# Altium PCB ACH512识别升级仪V1.2_20260608.PcbDoc (part 2 of 6)
Units mil, origin at the board's own origin, x right, y up, seen from the top; angles counter-clockwise.
Board outline 6141.73 x 5401.57 mil, 2 copper layers (Top Layer, Bottom Layer); 157 components, 111 nets, 548 pads, 222 vias.
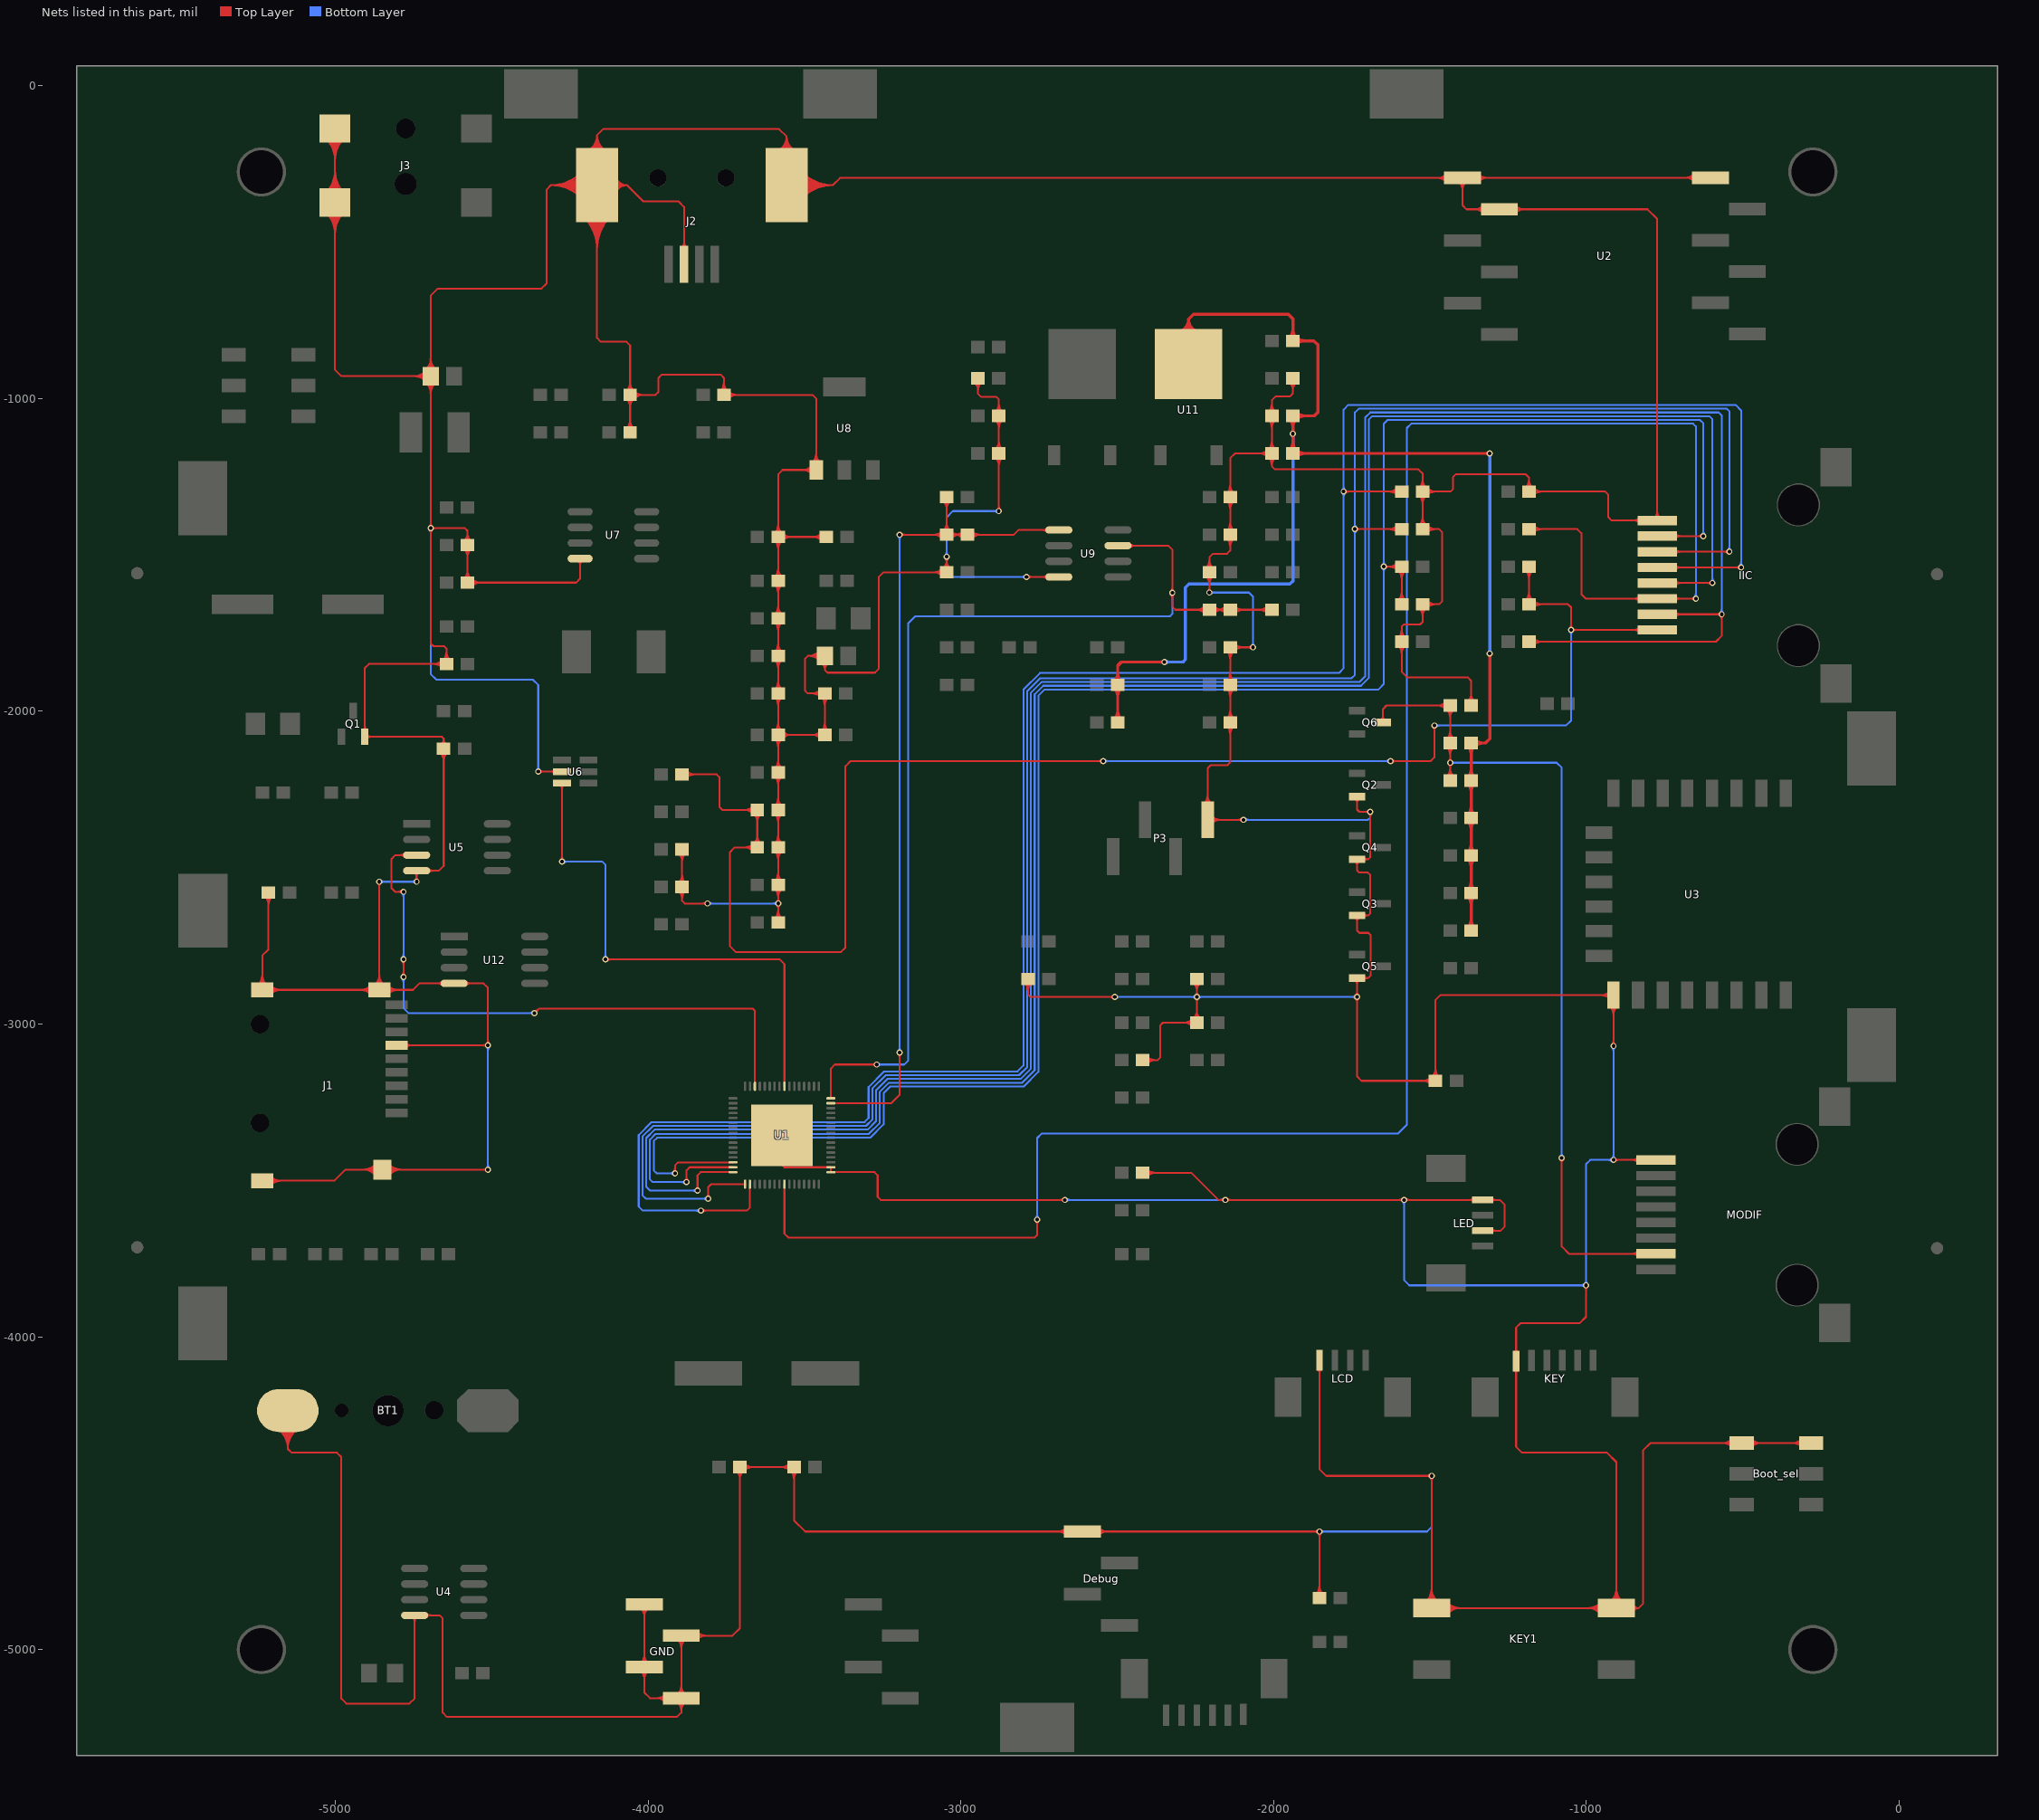
[diagram p2: the nets of this part, all layers, seen from the top]

## Via types
v1: diameter 19.68, hole 11.81, Top Layer to Bottom Layer, 222 vias

## Nets (pads, with @x,y where several pads share a name; then routed paths per layer and width w, separated by ;. In a path a pad name is that pad's centre, name@x,y a point inside that pad or via, vN(x,y) a via of type N, cw(c..) or ccw(c..) an arc to the next point about the centre after c; other vN are vias at no path point) (continued)
CHIP1_5.3V: C32.2 C35.2 C39.2 C45.1 C46.1 R29.2 R30.2 R36.1 R38.2 R45.2 R57.2 U11.4 | length 6304.3
  Top Layer w10: C39.2@-2508.73,-2025.21 ccw(c-2533.8,-2000.14) -2498.35,-2000.14 ccw(c-2462.89,-2000.14) C39.2@-2487.96,-2025.21 ; R45.2@-2508.73,-1925.97 cw(c-2533.8,-1951.04) -2498.35,-1951.04 cw(c-2462.89,-1951.04) R45.2@-2487.96,-1925.97 ; R45.2@-2508.73,-1905.21 ccw(c-2533.8,-1880.14) -2498.35,-1880.14 ccw(c-2462.89,-1880.14) R45.2@-2487.96,-1905.21 ; C39.2@-2498.35,-2035.59 R45.2@-2498.35,-1915.59 -2498.35,-1854.13 -2486.81,-1842.59 v1(-2348.81,-1842.59) ; v1@-2352.23,-1846.01 ccw(c-2360.5,-1854.28) -2360.5,-1842.59 ccw(c-2360.5,-1830.9) v1@-2352.23,-1839.17 ; U11.4@-2301.89,-787.19 ccw(c-2314.25,-746.59) -2271.81,-746.59 ; U11.4@-2298.98,-796.76 ccw(c-2310.14,-760.09) -2271.81,-760.09 ccw(c-2233.48,-760.09) U11.4@-2244.64,-796.76 ; U11.4@-2296.06,-806.33 ccw(c-2306.03,-773.59) -2271.81,-773.59 ccw(c-2237.59,-773.59) U11.4@-2247.56,-806.33 ; U11.4@-2271.81,-889.92 -2271.81,-746.59 ; U11.4@-2241.73,-787.19 cw(c-2229.37,-746.59) -2271.81,-746.59 ; C46.1@-1948.73,-1165.21 ccw(c-1973.8,-1140.14) -1938.35,-1140.14 ccw(c-1902.89,-1140.14) C46.1@-1927.96,-1165.21 ; C45.1@-1948.73,-1065.97 cw(c-1973.8,-1091.04) -1938.35,-1091.04 cw(c-1902.89,-1091.04) C45.1@-1927.96,-1065.97 ; R57.2@-1948.73,-805.21 ccw(c-1973.8,-780.14) -1938.35,-780.14 ccw(c-1902.89,-780.14) R57.2@-1927.96,-805.21 ; v1@-1941.77,-1116.01 cw(c-1950.04,-1124.28) -1938.35,-1124.28 cw(c-1926.65,-1124.28) v1@-1934.92,-1116.01 ; v1@-1941.77,-1109.17 ccw(c-1950.04,-1100.9) -1938.35,-1100.9 ccw(c-1926.65,-1100.9) v1@-1934.92,-1109.17 ; C46.1@-1925.99,-1185.97 cw(c-1900.92,-1211.04) -1900.92,-1175.59 cw(c-1900.92,-1140.14) C46.1@-1925.99,-1165.21 ; C45.1@-1925.99,-1065.97 cw(c-1900.92,-1091.04) -1900.92,-1055.59 cw(c-1900.92,-1020.14) C45.1@-1925.99,-1045.21 ; R57.2@-1925.99,-825.97 cw(c-1900.92,-851.04) -1900.92,-815.59 cw(c-1900.92,-780.14) R57.2@-1925.99,-805.21 ; R36.1@-1378.73,-2691.21 ccw(c-1403.8,-2666.14) -1368.35,-2666.14 ccw(c-1332.89,-2666.14) R36.1@-1357.96,-2691.21 ; R30.2@-1378.73,-2591.97 cw(c-1403.8,-2617.04) -1368.35,-2617.04 cw(c-1332.89,-2617.04) R30.2@-1357.96,-2591.97 ; R30.2@-1378.73,-2571.21 ccw(c-1403.8,-2546.14) -1368.35,-2546.14 ccw(c-1332.89,-2546.14) R30.2@-1357.96,-2571.21 ; C32.2@-1378.73,-2471.97 cw(c-1403.8,-2497.04) -1368.35,-2497.04 cw(c-1332.89,-2497.04) C32.2@-1357.96,-2471.97 ; C32.2@-1378.73,-2451.21 ccw(c-1403.8,-2426.14) -1368.35,-2426.14 ccw(c-1332.89,-2426.14) C32.2@-1357.96,-2451.21 ; R29.2@-1378.73,-2351.97 cw(c-1403.8,-2377.04) -1368.35,-2377.04 cw(c-1332.89,-2377.04) R29.2@-1357.96,-2351.97 ; R29.2@-1378.73,-2331.21 ccw(c-1403.8,-2306.14) -1368.35,-2306.14 ccw(c-1332.89,-2306.14) R29.2@-1357.96,-2331.21 ; R38.2@-1378.73,-2231.97 cw(c-1403.8,-2257.04) -1368.35,-2257.04 cw(c-1332.89,-2257.04) R38.2@-1357.96,-2231.97 ; R38.2@-1378.73,-2211.21 ccw(c-1403.8,-2186.14) -1368.35,-2186.14 ccw(c-1332.89,-2186.14) R38.2@-1357.96,-2211.21 ; C35.2@-1378.73,-2111.97 cw(c-1403.8,-2137.04) -1368.35,-2137.04 cw(c-1332.89,-2137.04) C35.2@-1357.96,-2111.97 ; R36.1@-1368.35,-2701.59 R30.2@-1368.35,-2581.59 C32.2@-1368.35,-2461.59 R29.2@-1368.35,-2341.59 R38.2@-1368.35,-2221.59 C35.2@-1368.35,-2101.59 -1322.81,-2101.59 -1308.81,-2087.59 v1(-1308.81,-1815.59) ; C35.2@-1355.99,-2111.97 cw(c-1330.92,-2137.04) -1330.92,-2101.59 cw(c-1330.92,-2066.14) C35.2@-1355.99,-2091.21 ; v1@-1312.23,-1819.01 cw(c-1320.5,-1827.28) -1308.81,-1827.28 cw(c-1297.12,-1827.28) v1@-1305.39,-1819.01 ; v1@-1312.23,-1179.01 ccw(c-1320.5,-1187.28) -1320.5,-1175.59 ccw(c-1320.5,-1163.9) v1@-1312.23,-1172.17 ; v1(-1308.81,-1175.59) C46.1@-1938.35,-1175.59 v1(-1938.35,-1112.59) C45.1@-1938.35,-1055.59 -1869.81,-1055.59 -1858.81,-1044.59 -1858.81,-827.59 -1870.81,-815.59 R57.2@-1938.35,-815.59 -1938.35,-745.05 -1952.81,-730.59 -2255.81,-730.59 -2271.81,-746.59
  Bottom Layer w10: v1(-2348.81,-1842.59) -2289.81,-1842.59 -2281.81,-1834.59 -2281.81,-1604.59 -2270.81,-1593.59 -1947.81,-1593.59 -1938.35,-1584.13 v1(-1938.35,-1112.59) ; v1@-2345.39,-1846.01 cw(c-2337.12,-1854.28) -2337.12,-1842.59 cw(c-2337.12,-1830.9) v1@-2345.39,-1839.17 ; v1@-1941.77,-1116.01 cw(c-1950.04,-1124.28) -1938.35,-1124.28 cw(c-1926.65,-1124.28) v1@-1934.92,-1116.01 ; v1@-1312.23,-1812.17 ccw(c-1320.5,-1803.9) -1308.81,-1803.9 ccw(c-1297.12,-1803.9) v1@-1305.39,-1812.17 ; v1@-1312.23,-1179.01 cw(c-1320.5,-1187.28) -1308.81,-1187.28 cw(c-1297.12,-1187.28) v1@-1305.39,-1179.01 ; v1(-1308.81,-1815.59) v1(-1308.81,-1175.59)
CLK1: C35.1 C36.1 MODIF.2 Q6.3 R38.1 | length 3434.7
  Top Layer w6: Q6.3@-1656.7,-2029.36 ccw(c-1671.74,-2014.32) -1650.47,-2014.32 ccw(c-1629.2,-2014.32) Q6.3@-1644.24,-2029.36 ; Q6.3@-1650.47,-2035.59 -1650.47,-1993.25 -1638.81,-1981.59 C36.1@-1435.27,-1981.59 C35.1@-1435.27,-2101.59 v1(-1435.27,-2164.59) R38.1@-1435.27,-2221.59 ; C36.1@-1449.04,-1993.39 ccw(c-1477.52,-2021.87) -1477.52,-1981.59 ccw(c-1477.52,-1941.31) C36.1@-1449.04,-1969.79 ; R38.1@-1447.07,-2209.79 ccw(c-1475.56,-2181.31) -1435.27,-2181.31 ccw(c-1394.99,-2181.31) R38.1@-1423.48,-2209.79 ; C35.1@-1447.07,-2113.39 cw(c-1475.56,-2141.87) -1435.27,-2141.87 cw(c-1394.99,-2141.87) C35.1@-1423.48,-2113.39 ; C35.1@-1447.07,-2089.79 ccw(c-1475.56,-2061.31) -1435.27,-2061.31 ccw(c-1394.99,-2061.31) C35.1@-1423.48,-2089.79 ; C36.1@-1447.07,-1993.39 cw(c-1475.56,-2021.87) -1435.27,-2021.87 cw(c-1394.99,-2021.87) C36.1@-1423.48,-1993.39 ; C36.1@-1444.8,-1989.15 ccw(c-1463.04,-2007.39) -1463.04,-1981.59 ccw(c-1463.04,-1955.79) C36.1@-1444.8,-1974.03 ; R38.1@-1442.83,-2214.03 ccw(c-1461.07,-2195.79) -1435.27,-2195.79 ccw(c-1409.48,-2195.79) R38.1@-1427.72,-2214.03 ; C35.1@-1442.83,-2109.15 cw(c-1461.07,-2127.39) -1435.27,-2127.39 cw(c-1409.48,-2127.39) C35.1@-1427.72,-2109.15 ; C35.1@-1442.83,-2094.03 ccw(c-1461.07,-2075.79) -1435.27,-2075.79 ccw(c-1409.48,-2075.79) C35.1@-1427.72,-2094.03 ; C36.1@-1442.83,-1989.15 cw(c-1461.07,-2007.39) -1435.27,-2007.39 cw(c-1409.48,-2007.39) C36.1@-1427.72,-1989.15 ; v1@-1440.11,-2169.43 cw(c-1451.79,-2181.11) -1435.27,-2181.11 cw(c-1418.76,-2181.11) v1@-1430.44,-2169.43 ; v1@-1440.11,-2159.75 ccw(c-1451.79,-2148.07) -1435.27,-2148.07 ccw(c-1418.76,-2148.07) v1@-1430.44,-2159.75 ; v1@-1083.65,-3433.43 cw(c-1095.33,-3445.11) -1078.81,-3445.11 cw(c-1062.29,-3445.11) v1@-1073.97,-3433.43 ; v1(-1078.81,-3428.59) -1078.81,-3711.59 -1055.81,-3734.59 MODIF.2@-777.58,-3734.59 ; MODIF.2@-833.67,-3743.05 ccw(c-854.09,-3763.47) -854.09,-3734.59 ccw(c-854.09,-3705.71) MODIF.2@-833.67,-3726.13
  Bottom Layer w6: v1(-1435.27,-2164.59) -1094.81,-2164.59 -1078.81,-2180.59 v1(-1078.81,-3428.59) ; v1@-1430.44,-2169.43 cw(c-1418.76,-2181.11) -1418.76,-2164.59 cw(c-1418.76,-2148.07) v1@-1430.44,-2159.75 ; v1@-1083.65,-3423.75 ccw(c-1095.33,-3412.07) -1078.81,-3412.07 ccw(c-1062.29,-3412.07) v1@-1073.97,-3423.75
CMP_DAT1: R43.1 R44.1 R44.2 U1.47 U9.1 | length 3417.2
  Top Layer w6: U1.47@-3415.31,-3253.23 -3222.42,-3253.23 -3195.81,-3226.62 v1(-3195.81,-3091.59) ; v1@-3200.65,-3096.43 cw(c-3212.33,-3108.11) -3195.81,-3108.11 cw(c-3179.29,-3108.11) v1@-3190.97,-3096.43 ; v1(-3195.81,-1435.59) R44.1@-3045.27,-1435.59 ; v1@-3190.97,-1440.43 cw(c-3179.29,-1452.11) -3179.29,-1435.59 cw(c-3179.29,-1419.07) v1@-3190.97,-1430.75 ; R44.1@-3059.04,-1447.39 ccw(c-3087.52,-1475.87) -3087.52,-1435.59 ccw(c-3087.52,-1395.31) R44.1@-3059.04,-1423.79 ; R44.1@-3057.07,-1423.79 ccw(c-3085.56,-1395.31) -3045.27,-1395.31 ccw(c-3004.99,-1395.31) R44.1@-3033.48,-1423.79 ; R43.1@-3057.07,-1327.39 cw(c-3085.56,-1355.87) -3045.27,-1355.87 cw(c-3004.99,-1355.87) R43.1@-3033.48,-1327.39 ; R44.1@-3054.8,-1443.15 ccw(c-3073.04,-1461.39) -3073.04,-1435.59 ccw(c-3073.04,-1409.79) R44.1@-3054.8,-1428.03 ; R44.1@-3052.83,-1428.03 ccw(c-3071.07,-1409.79) -3045.27,-1409.79 ccw(c-3019.48,-1409.79) R44.1@-3037.72,-1428.03 ; R43.1@-3052.83,-1323.15 cw(c-3071.07,-1341.39) -3045.27,-1341.39 cw(c-3019.48,-1341.39) R43.1@-3037.72,-1323.15 ; R43.1@-3045.27,-1315.59 R44.1@-3045.27,-1435.59 ; R44.1@-3035.75,-1443.15 cw(c-3017.51,-1461.39) -3017.51,-1435.59 cw(c-3017.51,-1409.79) R44.1@-3035.75,-1428.03 ; R44.1@-3031.51,-1447.39 cw(c-3003.02,-1475.87) -3003.02,-1435.59 cw(c-3003.02,-1395.31) R44.1@-3031.51,-1423.79 ; R44.2@-2992.11,-1447.39 ccw(c-3020.6,-1475.87) -3020.6,-1435.59 ccw(c-3020.6,-1395.31) R44.2@-2992.11,-1423.79 ; R44.2@-2987.87,-1443.15 ccw(c-3006.11,-1461.39) -3006.11,-1435.59 ccw(c-3006.11,-1409.79) R44.2@-2987.87,-1428.03 ; R44.2@-2968.82,-1443.15 cw(c-2950.58,-1461.39) -2950.58,-1435.59 cw(c-2950.58,-1409.79) R44.2@-2968.82,-1428.03 ; R44.2@-2964.58,-1447.39 cw(c-2936.1,-1475.87) -2936.1,-1435.59 cw(c-2936.1,-1395.31) R44.2@-2964.58,-1423.79 ; U9.1@-2724.02,-1426.82 ccw(c-2739.07,-1441.86) -2739.07,-1420.59 ccw(c-2739.07,-1399.32) U9.1@-2724.02,-1414.36 ; U9.1@-2686.3,-1420.59 -2815.81,-1420.59 -2830.81,-1435.59 R44.2@-2978.35,-1435.59 R44.1@-3045.27,-1435.59
  Bottom Layer w6: v1@-3200.65,-3086.75 ccw(c-3212.33,-3075.07) -3195.81,-3075.07 ccw(c-3179.29,-3075.07) v1@-3190.97,-3086.75 ; v1@-3200.65,-1440.43 cw(c-3212.33,-1452.11) -3195.81,-1452.11 cw(c-3179.29,-1452.11) v1@-3190.97,-1440.43 ; v1(-3195.81,-3091.59) v1(-3195.81,-1435.59)
CMP_DAT2: R52.1 R53.1 R53.2 U1.48 U9.7 | length 4040.6
  Top Layer w6: U1.48@-3415.31,-3237.48 -3415.31,-3142.09 -3402.81,-3129.59 v1(-3268.81,-3129.59) ; v1@-3273.65,-3134.43 ccw(c-3285.33,-3146.11) -3285.33,-3129.59 ccw(c-3285.33,-3113.07) v1@-3273.65,-3124.75 ; U9.7@-2497.32,-1470.59 -2336.81,-1470.59 -2323.81,-1483.59 v1(-2323.81,-1621.59) -2323.81,-1665.59 -2313.81,-1675.59 R53.1@-2205.27,-1675.59 R53.2@-2138.35,-1675.59 R52.1@-2005.27,-1675.59 ; U9.7@-2459.6,-1476.82 cw(c-2444.55,-1491.86) -2444.55,-1470.59 cw(c-2444.55,-1449.32) U9.7@-2459.6,-1464.36 ; v1@-2328.65,-1626.43 cw(c-2340.33,-1638.11) -2323.81,-1638.11 cw(c-2307.29,-1638.11) v1@-2318.97,-1626.43 ; v1@-2328.65,-1616.75 ccw(c-2340.33,-1605.07) -2323.81,-1605.07 ccw(c-2307.29,-1605.07) v1@-2318.97,-1616.75 ; R53.1@-2219.04,-1687.39 ccw(c-2247.52,-1715.87) -2247.52,-1675.59 ccw(c-2247.52,-1635.31) R53.1@-2219.04,-1663.79 ; R53.1@-2214.8,-1683.15 ccw(c-2233.04,-1701.39) -2233.04,-1675.59 ccw(c-2233.04,-1649.79) R53.1@-2214.8,-1668.03 ; R53.1@-2195.75,-1683.15 cw(c-2177.51,-1701.39) -2177.51,-1675.59 cw(c-2177.51,-1649.79) R53.1@-2195.75,-1668.03 ; R53.1@-2191.51,-1687.39 cw(c-2163.02,-1715.87) -2163.02,-1675.59 cw(c-2163.02,-1635.31) R53.1@-2191.51,-1663.79 ; R53.2@-2152.11,-1687.39 ccw(c-2180.6,-1715.87) -2180.6,-1675.59 ccw(c-2180.6,-1635.31) R53.2@-2152.11,-1663.79 ; R53.2@-2147.87,-1683.15 ccw(c-2166.11,-1701.39) -2166.11,-1675.59 ccw(c-2166.11,-1649.79) R53.2@-2147.87,-1668.03 ; R53.2@-2128.82,-1683.15 cw(c-2110.58,-1701.39) -2110.58,-1675.59 cw(c-2110.58,-1649.79) R53.2@-2128.82,-1668.03 ; R53.2@-2124.58,-1687.39 cw(c-2096.1,-1715.87) -2096.1,-1675.59 cw(c-2096.1,-1635.31) R53.2@-2124.58,-1663.79 ; R52.1@-2019.04,-1687.39 ccw(c-2047.52,-1715.87) -2047.52,-1675.59 ccw(c-2047.52,-1635.31) R52.1@-2019.04,-1663.79 ; R52.1@-2014.8,-1683.15 ccw(c-2033.04,-1701.39) -2033.04,-1675.59 ccw(c-2033.04,-1649.79) R52.1@-2014.8,-1668.03
  Bottom Layer w6: v1(-3268.81,-3129.59) -3180.81,-3129.59 -3168.81,-3117.59 -3168.81,-1719.59 -3145.81,-1696.59 -2331.81,-1696.59 -2323.81,-1688.59 v1(-2323.81,-1621.59) ; v1@-3263.97,-3134.43 cw(c-3252.29,-3146.11) -3252.29,-3129.59 cw(c-3252.29,-3113.07) v1@-3263.97,-3124.75 ; v1@-2328.65,-1626.43 cw(c-2340.33,-1638.11) -2323.81,-1638.11 cw(c-2307.29,-1638.11) v1@-2318.97,-1626.43
ETHERNET_CHECK1: C30.1 IIC.5 U1.18 | length 7700.4
  Top Layer w6: v1(-3830.81,-3596.59) -3683.81,-3596.59 -3674.17,-3586.95 U1.18@-3674.17,-3512.09 ; v1@-3825.97,-3601.43 cw(c-3814.29,-3613.11) -3814.29,-3596.59 cw(c-3814.29,-3580.07) v1@-3825.97,-3591.75 ; v1(-1775.81,-1297.59) C30.1@-1590.27,-1297.59 ; v1@-1770.97,-1302.43 cw(c-1759.29,-1314.11) -1759.29,-1297.59 cw(c-1759.29,-1281.07) v1@-1770.97,-1292.75 ; C30.1@-1604.04,-1309.39 ccw(c-1632.52,-1337.87) -1632.52,-1297.59 ccw(c-1632.52,-1257.31) C30.1@-1604.04,-1285.79 ; C30.1@-1599.8,-1305.15 ccw(c-1618.04,-1323.39) -1618.04,-1297.59 ccw(c-1618.04,-1271.79) C30.1@-1599.8,-1290.03 ; IIC.5@-773.39,-1540 v1(-505.22,-1540) ; IIC.5@-717.29,-1548.46 cw(c-696.87,-1568.88) -696.87,-1540 cw(c-696.87,-1511.12) IIC.5@-717.29,-1531.54 ; v1@-510.06,-1544.84 ccw(c-521.74,-1556.52) -521.74,-1540 ccw(c-521.74,-1523.48) v1@-510.06,-1535.16
  Bottom Layer w6: v1@-3835.65,-3601.43 ccw(c-3847.33,-3613.11) -3847.33,-3596.59 ccw(c-3847.33,-3580.07) v1@-3835.65,-3591.75 ; v1(-3830.81,-3596.59) -4016.81,-3596.59 -4029.81,-3583.59 -4029.81,-3354.71 -3988.75,-3313.65 -3307.72,-3313.65 -3294.81,-3300.74 -3294.81,-3201.59 -3244.81,-3151.59 -2818.66,-3151.59 -2799.81,-3132.74 -2799.81,-1930.71 -2746.75,-1877.65 -1790.87,-1877.65 -1775.81,-1862.59 v1(-1775.81,-1297.59) -1775.81,-1035.59 -1760.81,-1020.59 -522.81,-1020.59 -505.22,-1038.18 v1(-505.22,-1540) ; v1@-1780.65,-1302.43 cw(c-1792.33,-1314.11) -1775.81,-1314.11 cw(c-1759.29,-1314.11) v1@-1770.97,-1302.43 ; v1@-1780.65,-1292.75 ccw(c-1792.33,-1281.07) -1775.81,-1281.07 ccw(c-1759.29,-1281.07) v1@-1770.97,-1292.75 ; v1@-510.06,-1535.16 ccw(c-521.74,-1523.48) -505.22,-1523.48 ccw(c-488.7,-1523.48) v1@-500.38,-1535.16
ETHERNET_CHECK2: C31.1 IIC.6 U1.17 | length 7417.6
  Top Layer w6: v1@-3812.65,-3553.75 ccw(c-3824.33,-3542.07) -3807.81,-3542.07 ccw(c-3791.29,-3542.07) v1@-3802.97,-3553.75 ; v1(-3807.81,-3558.59) -3807.81,-3521.59 -3798.31,-3512.09 U1.17@-3689.92,-3512.09 ; v1(-1739.87,-1417.59) C31.1@-1590.27,-1417.59 ; v1@-1735.03,-1422.43 cw(c-1723.35,-1434.11) -1723.35,-1417.59 cw(c-1723.35,-1401.07) v1@-1735.03,-1412.75 ; C31.1@-1604.04,-1429.39 ccw(c-1632.52,-1457.87) -1632.52,-1417.59 ccw(c-1632.52,-1377.31) C31.1@-1604.04,-1405.79 ; C31.1@-1599.8,-1425.15 ccw(c-1618.04,-1443.39) -1618.04,-1417.59 ccw(c-1618.04,-1391.79) C31.1@-1599.8,-1410.03 ; IIC.6@-773.39,-1490 v1(-542.81,-1490) ; IIC.6@-717.29,-1498.46 cw(c-696.87,-1518.88) -696.87,-1490 cw(c-696.87,-1461.12) IIC.6@-717.29,-1481.54 ; v1@-547.65,-1494.84 ccw(c-559.33,-1506.52) -559.33,-1490 ccw(c-559.33,-1473.48) v1@-547.65,-1485.16
  Bottom Layer w6: v1@-3812.65,-3563.43 ccw(c-3824.33,-3575.11) -3824.33,-3558.59 ccw(c-3824.33,-3542.07) v1@-3812.65,-3553.75 ; v1(-3807.81,-3558.59) -4006.81,-3558.59 -4017.81,-3547.59 -4017.81,-3359.68 -3983.78,-3325.65 -3302.75,-3325.65 -3282.81,-3305.71 -3282.81,-3206.56 -3239.84,-3163.59 -2813.69,-3163.59 -2787.81,-3137.71 -2787.81,-1935.68 -2746.72,-1894.59 -1750.81,-1894.59 -1739.87,-1883.65 v1(-1739.87,-1417.59) -1739.87,-1044.65 -1727.81,-1032.59 -550.81,-1032.59 -542.81,-1040.59 v1(-542.81,-1490) ; v1@-1744.71,-1422.43 cw(c-1756.39,-1434.11) -1739.87,-1434.11 cw(c-1723.35,-1434.11) v1@-1735.03,-1422.43 ; v1@-1744.71,-1412.75 ccw(c-1756.39,-1401.07) -1739.87,-1401.07 ccw(c-1723.35,-1401.07) v1@-1735.03,-1412.75 ; v1@-547.65,-1485.16 ccw(c-559.33,-1473.48) -542.81,-1473.48 ccw(c-526.29,-1473.48) v1@-537.97,-1485.16
ETHERNET_CS: IIC.4 U1.15 | length 6892.6
  Top Layer w6: v1@-3881.65,-3500.75 ccw(c-3893.33,-3489.07) -3876.81,-3489.07 ccw(c-3860.29,-3489.07) v1@-3871.97,-3500.75 ; v1(-3876.81,-3505.59) -3876.81,-3467.59 -3867.17,-3457.95 U1.15@-3728.31,-3457.95 ; IIC.4@-773.39,-1590 v1(-596.81,-1590) ; IIC.4@-717.29,-1598.46 cw(c-696.87,-1618.88) -696.87,-1590 cw(c-696.87,-1561.12) IIC.4@-717.29,-1581.54 ; v1@-601.65,-1594.84 ccw(c-613.33,-1606.52) -613.33,-1590 ccw(c-613.33,-1573.48) v1@-601.65,-1585.16
  Bottom Layer w6: v1@-3881.65,-3510.43 ccw(c-3893.33,-3522.11) -3893.33,-3505.59 ccw(c-3893.33,-3489.07) v1@-3881.65,-3500.75 ; v1(-3876.81,-3505.59) -3984.81,-3505.59 -3993.81,-3496.59 -3993.81,-3369.62 -3975.78,-3351.59 -3294.75,-3351.59 -3258.81,-3315.65 -3258.81,-3216.5 -3229.9,-3187.59 -2803.75,-3187.59 -2763.81,-3147.65 -2763.81,-1945.62 -2736.78,-1918.59 -1720.81,-1918.59 -1694.81,-1892.59 -1694.81,-1066.59 -1684.81,-1056.59 -606.81,-1056.59 -596.81,-1066.59 v1(-596.81,-1590) ; v1@-601.65,-1585.16 ccw(c-613.33,-1573.48) -596.81,-1573.48 ccw(c-580.29,-1573.48) v1@-591.97,-1585.16
ETHERNET_IIC_SCL: IIC.2 R20.2 U1.16 | length 7955.1
  Top Layer w6: v1@-3846.65,-3527.75 ccw(c-3858.33,-3516.07) -3841.81,-3516.07 ccw(c-3825.29,-3516.07) v1@-3836.97,-3527.75 ; v1(-3841.81,-3532.59) -3841.81,-3483.59 -3831.92,-3473.7 U1.16@-3728.31,-3473.7 ; R20.2@-1183.35,-1777.59 -585.81,-1777.59 -567.4,-1759.18 v1(-567.4,-1690) IIC.2@-773.39,-1690 ; R20.2@-1173.82,-1785.15 cw(c-1155.58,-1803.39) -1155.58,-1777.59 cw(c-1155.58,-1751.79) R20.2@-1173.82,-1770.03 ; R20.2@-1169.58,-1789.39 cw(c-1141.1,-1817.87) -1141.1,-1777.59 cw(c-1141.1,-1737.31) R20.2@-1169.58,-1765.79 ; IIC.2@-717.29,-1698.46 cw(c-696.87,-1718.88) -696.87,-1690 cw(c-696.87,-1661.12) IIC.2@-717.29,-1681.54 ; v1@-572.24,-1685.16 cw(c-583.92,-1673.48) -583.92,-1690 cw(c-583.92,-1706.52) -572.24,-1694.84 cw(c-583.92,-1706.52) -567.4,-1706.52 cw(c-550.88,-1706.52) v1@-562.56,-1694.84
  Bottom Layer w6: v1@-3846.65,-3537.43 ccw(c-3858.33,-3549.11) -3858.33,-3532.59 ccw(c-3858.33,-3516.07) v1@-3846.65,-3527.75 ; v1(-3841.81,-3532.59) -3993.81,-3532.59 -4005.81,-3520.59 -4005.81,-3364.65 -3978.81,-3337.65 -3297.78,-3337.65 -3270.81,-3310.68 -3270.81,-3211.53 -3234.87,-3175.59 -2808.72,-3175.59 -2775.81,-3142.68 -2775.81,-1940.65 -2741.75,-1906.59 -1725.78,-1906.59 -1706.81,-1887.62 -1706.81,-1060.59 -1690.81,-1044.59 -576.81,-1044.59 -567.4,-1054 v1(-567.4,-1690) ; v1@-572.24,-1685.16 ccw(c-583.92,-1673.48) -567.4,-1673.48 ccw(c-550.88,-1673.48) v1@-562.56,-1685.16
ETHERNET_IIC_SDA: IIC.3 R21.2 U1.25 | length 7233.8
  Top Layer w6: U1.25@-3563.94,-3512.09 -3563.94,-3670.46 -3551.81,-3682.59 -2763.81,-3682.59 -2755.81,-3674.59 v1(-2755.81,-3625.59) ; v1@-2760.65,-3630.43 cw(c-2772.33,-3642.11) -2755.81,-3642.11 cw(c-2739.29,-3642.11) v1@-2750.97,-3630.43 ; R21.2@-1183.35,-1417.59 -1028.81,-1417.59 -1015.81,-1430.59 -1015.81,-1625.59 -1001.4,-1640 IIC.3@-773.39,-1640 v1(-649.81,-1640) ; R21.2@-1173.82,-1425.15 cw(c-1155.58,-1443.39) -1155.58,-1417.59 cw(c-1155.58,-1391.79) R21.2@-1173.82,-1410.03 ; R21.2@-1169.58,-1429.39 cw(c-1141.1,-1457.87) -1141.1,-1417.59 cw(c-1141.1,-1377.31) R21.2@-1169.58,-1405.79 ; IIC.3@-829.48,-1648.46 ccw(c-849.9,-1668.88) -849.9,-1640 ccw(c-849.9,-1611.12) IIC.3@-829.48,-1631.54 ; IIC.3@-717.29,-1648.46 cw(c-696.87,-1668.88) -696.87,-1640 cw(c-696.87,-1611.12) IIC.3@-717.29,-1631.54 ; v1@-654.65,-1644.84 ccw(c-666.33,-1656.52) -666.33,-1640 ccw(c-666.33,-1623.48) v1@-654.65,-1635.16
  Bottom Layer w6: v1@-2760.65,-3620.75 ccw(c-2772.33,-3609.07) -2755.81,-3609.07 ccw(c-2739.29,-3609.07) v1@-2750.97,-3620.75 ; v1(-2755.81,-3625.59) -2755.81,-3364.59 -2741.81,-3350.59 -1602.81,-3350.59 -1573.81,-3321.59 -1573.81,-1094.59 -1559.81,-1080.59 -658.81,-1080.59 -649.81,-1089.59 v1(-649.81,-1640) ; v1@-654.65,-1635.16 ccw(c-666.33,-1623.48) -649.81,-1623.48 ccw(c-633.29,-1623.48) v1@-644.97,-1635.16
ETHERNET_ONEWIRE: C29.2 IIC.7 R24.1 U1.14 | length 7169.2
  Top Layer w6: v1@-3918.65,-3472.75 ccw(c-3930.33,-3461.07) -3913.81,-3461.07 ccw(c-3897.29,-3461.07) v1@-3908.97,-3472.75 ; v1(-3913.81,-3477.59) -3913.81,-3452.59 -3903.42,-3442.2 U1.14@-3728.31,-3442.2 ; v1(-1647.81,-1537.59) R24.1@-1590.27,-1537.59 C29.2@-1590.27,-1657.59 ; v1@-1642.97,-1542.43 cw(c-1631.29,-1554.11) -1631.29,-1537.59 cw(c-1631.29,-1521.07) v1@-1642.97,-1532.75 ; R24.1@-1604.04,-1549.39 ccw(c-1632.52,-1577.87) -1632.52,-1537.59 ccw(c-1632.52,-1497.31) R24.1@-1604.04,-1525.79 ; C29.2@-1602.07,-1645.79 ccw(c-1630.56,-1617.31) -1590.27,-1617.31 ccw(c-1549.99,-1617.31) C29.2@-1578.48,-1645.79 ; R24.1@-1602.07,-1549.39 cw(c-1630.56,-1577.87) -1590.27,-1577.87 cw(c-1549.99,-1577.87) R24.1@-1578.48,-1549.39 ; R24.1@-1599.8,-1545.15 ccw(c-1618.04,-1563.39) -1618.04,-1537.59 ccw(c-1618.04,-1511.79) R24.1@-1599.8,-1530.03 ; C29.2@-1597.83,-1650.03 ccw(c-1616.07,-1631.79) -1590.27,-1631.79 ccw(c-1564.48,-1631.79) C29.2@-1582.72,-1650.03 ; R24.1@-1597.83,-1545.15 cw(c-1616.07,-1563.39) -1590.27,-1563.39 cw(c-1564.48,-1563.39) R24.1@-1582.72,-1545.15 ; IIC.7@-773.39,-1440 v1(-625.81,-1440) ; IIC.7@-717.29,-1448.46 cw(c-696.87,-1468.88) -696.87,-1440 cw(c-696.87,-1411.12) IIC.7@-717.29,-1431.54 ; v1@-630.65,-1444.84 ccw(c-642.33,-1456.52) -642.33,-1440 ccw(c-642.33,-1423.48) v1@-630.65,-1435.16
  Bottom Layer w6: v1@-3918.65,-3482.43 ccw(c-3930.33,-3494.11) -3930.33,-3477.59 ccw(c-3930.33,-3461.07) v1@-3918.65,-3472.75 ; v1(-3913.81,-3477.59) -3971.81,-3477.59 -3981.81,-3467.59 -3981.81,-3374.59 -3970.81,-3363.59 -3289.78,-3363.59 -3246.81,-3320.62 -3246.81,-3221.47 -3224.93,-3199.59 -2798.78,-3199.59 -2751.81,-3152.62 -2751.81,-1950.59 -2731.81,-1930.59 -1664.81,-1930.59 -1647.81,-1913.59 v1(-1647.81,-1537.59) -1647.81,-1081.59 -1634.81,-1068.59 -636.81,-1068.59 -625.81,-1079.59 v1(-625.81,-1440) ; v1@-1652.65,-1542.43 cw(c-1664.33,-1554.11) -1647.81,-1554.11 cw(c-1631.29,-1554.11) v1@-1642.97,-1542.43 ; v1@-1652.65,-1532.75 ccw(c-1664.33,-1521.07) -1647.81,-1521.07 ccw(c-1631.29,-1521.07) v1@-1642.97,-1532.75 ; v1@-630.65,-1435.16 ccw(c-642.33,-1423.48) -625.81,-1423.48 ccw(c-609.29,-1423.48) v1@-620.97,-1435.16
ETHERNET_POWER_CTRL: U1.56 U6.3 | length 1798.8
  Top Layer w6: U6.3@-4280.67,-2235.85 cw(c-4294.03,-2249.21) -4275.13,-2249.21 cw(c-4256.24,-2249.21) U6.3@-4269.6,-2235.85 ; v1@-4279.97,-2476.16 ccw(c-4291.65,-2464.48) -4275.13,-2464.48 ccw(c-4258.61,-2464.48) v1@-4270.29,-2476.16 ; v1(-4275.13,-2481) U6.3@-4275.13,-2230.31 ; v1(-4136,-2793.59) -3578.94,-2793.59 -3563.94,-2808.59 U1.56@-3563.94,-3199.09 ; v1@-4131.16,-2798.43 cw(c-4119.48,-2810.11) -4119.48,-2793.59 cw(c-4119.48,-2777.07) v1@-4131.16,-2788.75
  Bottom Layer w6: v1(-4275.13,-2481) -4146,-2481 -4136,-2491 -4136,-2551 v1(-4136,-2793.59) ; v1@-4270.29,-2485.84 cw(c-4258.61,-2497.52) -4258.61,-2481 cw(c-4258.61,-2464.48) v1@-4270.29,-2476.16 ; v1@-4140.84,-2788.75 ccw(c-4152.52,-2777.07) -4136,-2777.07 ccw(c-4119.48,-2777.07) v1@-4131.16,-2788.75
ETHERNET_VCC: C13.1 C14.1 D2.2 IIC.1 R22.2 R23.1 | length 6266.4
  Top Layer w6: D2.2@-3891.35,-2201.59 -3780.81,-2201.59 -3771.81,-2210.59 -3771.81,-2305.59 -3761.81,-2315.59 C13.1@-3650.74,-2315.59 C14.1@-3650.74,-2435.59 -3722.81,-2435.59 -3738.81,-2451.59 -3738.81,-2750.59 -3719.81,-2769.59 -3382.81,-2769.59 -3368.81,-2755.59 -3368.81,-2175.59 -3352.81,-2159.59 v1(-2544.81,-2159.59) ; D2.2@-3881.82,-2209.15 cw(c-3863.58,-2227.39) -3863.58,-2201.59 cw(c-3863.58,-2175.79) D2.2@-3881.82,-2194.03 ; D2.2@-3877.58,-2213.39 cw(c-3849.1,-2241.87) -3849.1,-2201.59 cw(c-3849.1,-2161.31) D2.2@-3877.58,-2189.79 ; C14.1@-3664.51,-2447.39 ccw(c-3692.99,-2475.87) -3692.99,-2435.59 ccw(c-3692.99,-2395.31) C14.1@-3664.51,-2423.79 ; C13.1@-3664.51,-2327.39 ccw(c-3692.99,-2355.87) -3692.99,-2315.59 ccw(c-3692.99,-2275.31) C13.1@-3664.51,-2303.79 ; C14.1@-3662.54,-2423.79 ccw(c-3691.02,-2395.31) -3650.74,-2395.31 ccw(c-3610.46,-2395.31) C14.1@-3638.94,-2423.79 ; C13.1@-3662.54,-2327.39 cw(c-3691.02,-2355.87) -3650.74,-2355.87 cw(c-3610.46,-2355.87) C13.1@-3638.94,-2327.39 ; C14.1@-3660.26,-2443.15 ccw(c-3678.5,-2461.39) -3678.5,-2435.59 ccw(c-3678.5,-2409.79) C14.1@-3660.26,-2428.03 ; C13.1@-3660.26,-2323.15 ccw(c-3678.5,-2341.39) -3678.5,-2315.59 ccw(c-3678.5,-2289.79) C13.1@-3660.26,-2308.03 ; C14.1@-3658.29,-2428.03 ccw(c-3676.54,-2409.79) -3650.74,-2409.79 ccw(c-3624.94,-2409.79) C14.1@-3643.18,-2428.03 ; C13.1@-3658.29,-2323.15 cw(c-3676.54,-2341.39) -3650.74,-2341.39 cw(c-3624.94,-2341.39) C13.1@-3643.18,-2323.15 ; v1@-2549.65,-2164.43 ccw(c-2561.33,-2176.11) -2561.33,-2159.59 ccw(c-2561.33,-2143.07) v1@-2549.65,-2154.75 ; v1(-1625.81,-2159.59) -1497.81,-2159.59 -1485.81,-2147.59 v1(-1485.81,-2045.59) ; v1@-1620.97,-2164.43 cw(c-1609.29,-2176.11) -1609.29,-2159.59 cw(c-1609.29,-2143.07) v1@-1620.97,-2154.75 ; v1@-1490.65,-2050.43 cw(c-1502.33,-2062.11) -1485.81,-2062.11 cw(c-1469.29,-2062.11) v1@-1480.97,-2050.43 ; R22.2@-1195.14,-1645.79 ccw(c-1223.63,-1617.31) -1183.35,-1617.31 ccw(c-1143.06,-1617.31) R22.2@-1171.55,-1645.79 ; R23.1@-1195.14,-1549.39 cw(c-1223.63,-1577.87) -1183.35,-1577.87 cw(c-1143.06,-1577.87) R23.1@-1171.55,-1549.39 ; R22.2@-1190.9,-1650.03 ccw(c-1209.14,-1631.79) -1183.35,-1631.79 ccw(c-1157.55,-1631.79) R22.2@-1175.79,-1650.03 ; R23.1@-1190.9,-1545.15 cw(c-1209.14,-1563.39) -1183.35,-1563.39 cw(c-1157.55,-1563.39) R23.1@-1175.79,-1545.15 ; R23.1@-1183.35,-1537.59 R22.2@-1183.35,-1657.59 -1058.81,-1657.59 -1048.81,-1667.59 v1(-1048.81,-1740) IIC.1@-773.39,-1740 ; R22.2@-1173.82,-1665.15 cw(c-1155.58,-1683.39) -1155.58,-1657.59 cw(c-1155.58,-1631.79) R22.2@-1173.82,-1650.03 ; R22.2@-1169.58,-1669.39 cw(c-1141.1,-1697.87) -1141.1,-1657.59 cw(c-1141.1,-1617.31) R22.2@-1169.58,-1645.79 ; v1@-1053.65,-1735.16 ccw(c-1065.33,-1723.48) -1048.81,-1723.48 ccw(c-1032.29,-1723.48) -1043.97,-1735.16 ccw(c-1032.29,-1723.48) -1032.29,-1740 ccw(c-1032.29,-1756.52) v1@-1043.97,-1744.84 ; IIC.1@-829.48,-1748.46 ccw(c-849.9,-1768.88) -849.9,-1740 ccw(c-849.9,-1711.12) IIC.1@-829.48,-1731.54
  Bottom Layer w6: v1(-2544.81,-2159.59) v1(-1625.81,-2159.59) ; v1@-2539.97,-2164.43 cw(c-2528.29,-2176.11) -2528.29,-2159.59 cw(c-2528.29,-2143.07) v1@-2539.97,-2154.75 ; v1@-1630.65,-2164.43 ccw(c-1642.33,-2176.11) -1642.33,-2159.59 ccw(c-1642.33,-2143.07) v1@-1630.65,-2154.75 ; v1(-1485.81,-2045.59) -1064.81,-2045.59 -1048.81,-2029.59 v1(-1048.81,-1740) ; v1@-1480.97,-2050.43 cw(c-1469.29,-2062.11) -1469.29,-2045.59 cw(c-1469.29,-2029.07) v1@-1480.97,-2040.75 ; v1@-1053.65,-1744.84 cw(c-1065.33,-1756.52) -1048.81,-1756.52 cw(c-1032.29,-1756.52) v1@-1043.97,-1744.84
FLASH_WP: U1.62 U5.3 | length 2214.9
  Top Layer w6: v1@-4786.84,-2845.16 ccw(c-4798.52,-2833.48) -4782,-2833.48 ccw(c-4765.48,-2833.48) v1@-4777.16,-2845.16 ; v1@-4786.84,-2797.84 cw(c-4798.52,-2809.52) -4782,-2809.52 cw(c-4765.48,-2809.52) v1@-4777.16,-2797.84 ; v1@-4786.84,-2581.84 ccw(c-4798.52,-2593.52) -4798.52,-2577 ccw(c-4798.52,-2560.48) v1@-4786.84,-2572.16 ; v1(-4782,-2850) v1(-4782,-2793) ; v1(-4782,-2577) -4809,-2577 -4820,-2566 -4820,-2472 -4808,-2460 U5.3@-4740,-2460 ; U5.3@-4777.73,-2466.23 ccw(c-4792.77,-2481.27) -4792.77,-2460 ccw(c-4792.77,-2438.73) U5.3@-4777.73,-2453.77 ; v1(-4363,-2965) -4348.59,-2950.59 -3665.81,-2950.59 -3658.42,-2957.98 U1.62@-3658.42,-3199.09 ; v1@-4363,-2958.16 ccw(c-4363,-2941.64) -4351.32,-2953.32 ccw(c-4339.64,-2965) v1@-4356.16,-2965
  Bottom Layer w6: v1@-4786.84,-2854.84 cw(c-4798.52,-2866.52) -4782,-2866.52 cw(c-4765.48,-2866.52) v1@-4777.16,-2854.84 ; v1@-4786.84,-2788.16 ccw(c-4798.52,-2776.48) -4782,-2776.48 ccw(c-4765.48,-2776.48) v1@-4777.16,-2788.16 ; v1@-4786.84,-2581.84 cw(c-4798.52,-2593.52) -4782,-2593.52 cw(c-4765.48,-2593.52) v1@-4777.16,-2581.84 ; v1(-4782,-2850) -4782,-2949 -4766,-2965 v1(-4363,-2965) ; v1(-4782,-2793) v1(-4782,-2577) ; v1@-4367.84,-2969.84 ccw(c-4379.52,-2981.52) -4379.52,-2965 ccw(c-4379.52,-2948.48) v1@-4367.84,-2960.16
GND: Boot_sel.3 BT1.2 C1.2 C2.2 C3.2 C4.1 C5.1 C6.1 C7.1 C8.1 C9.1 C10.1 C11.2 C12.2 C13.2 C14.2 C15.2 C16.2 C19.2 C20.2 C21.2 C22.2 C23.2 C24.2 C25.2 C26.2 C27.1 C28.2 C29.1 C30.2 C31.2 C34.1 C36.2 C37.2 C38.1 C40.1 C41.2 C42.1 C43.2 C44.2 C45.2 C46.2 C47.2 C48.1 D3.2 D5.2 Debug.4 GND.1 GND.2 GND.3 GND.4 IIC.8 J1.6 J1.10 J1.11 J1.12 J1.13 J2.4 J2.5 J2.6 J3.4 KEY1.2 KEY.6 LCD.4 LED.2 LED.4 MODIF.8 P3.4 Q1.2 Q2.2 Q3.2 Q4.2 Q5.2 R8.1 R17.1 R18.2 R28.1 R32.1 R35.2 R41.1 R50.1 R55.1 R56.1 U1.0 U1.33 U1.34 U2.1 U2.2 U2.7 U3.15 U4.4 U5.4 U6.2 U7.4 U8.1 U9.4 U12.4 | length 72097.3

## Text inside footprints (layer, text, board x,y; h text height)
F1: Mechanical 9 "2" at -4605.81,-1118.59 h25
J1: Mechanical 9 "9" at -4804.24,-2928.13 h30 r270; Mechanical 9 "8" at -4804.24,-2971.44 h30 r270; Mechanical 9 "7" at -4804.24,-3014.75 h30 r270; Mechanical 9 "5" at -4804.24,-3101.36 h30 r270; Mechanical 9 "3" at -4804.24,-3187.98 h30 r270; Mechanical 9 "2" at -4804.24,-3231.28 h30 r270; Mechanical 9 "1" at -4804.24,-3274.59 h30 r270; Mechanical 9 "4" at -4804.24,-3144.67 h30 r270; Mechanical 9 "12" at -5233.37,-2870.89 h30 r270; Mechanical 9 "13" at -5233.37,-3481.13 h30 r270; Mechanical 9 "6" at -4804.24,-3058.05 h30 r270; Mechanical 9 "11" at -4859.36,-2870.89 h30 r270; Mechanical 9 "10" at -4849.52,-3445.69 h30 r270
L1: Mechanical 9 "2" at -3990.22,-1799.52 h30